# EAGLE board rocketnet-daughter-14 (EAGLE 6.4)

Size 17.8 x 6.6 mm. Coordinates in mm from the lower left corner, seen from the top.
Outline: 17.8,0 17.8,6.6 1,6.6 0,5.6 0,1 1,0 17.8,0
Copper layers (1*16): Top 0.035mm / dielectric 1.5mm / Bottom 0.035mm
Design rules "lpkf-s63-epl": minimum track width 10mil, minimum drill 0.35mm, track to track 8mil, track to pad 8mil, pad to pad 8mil, via to via 8mil, smd to smd 8mil, copper to edge 10mil, drill to drill 8mil, minimum pad ring 10mil, minimum via ring 8mil, stop-mask expansion 4mil, vias tented up to drill 0mil, thermal gap 10mil
Holes 2.44 mm at 16.1,3.3 1.7,3.3

## Footprints (pad centres in the part's own frame; a part is rotated, then mirrored left to right if it is on the bottom)
22AWG-WIRE = drill 0.9 pad 1.6: P$1 0,0
HARWIN-M50-31507-NO-HOLES = smd 0.71 x 1.65: 1 -3.81,-1.925; 2 -3.81,1.925; 3 -2.54,-1.925; 4 -2.54,1.925; 5 -1.27,-1.925; 6 -1.27,1.925; 7 0,-1.925; 8 0,1.925; 9 1.27,-1.925; 10 1.27,1.925; 11 2.54,-1.925; 12 2.54,1.925; 13 3.81,-1.925; 14 3.81,1.925 | hole 0.71: 3.175,0; -3.175,0
26AWG-WIRE = drill 0.65: P$1 0,0

## Placement (x,y rotation side)
E$1  [22AWG-WIRE]  6.02,5.21 0 top
E$2  [HARWIN-M50-31507-NO-HOLES]  9.2,3.3 0 bottom
E$3  [22AWG-WIRE]  6.02,1.39 0 top
E$5  [22AWG-WIRE]  12.38,5.21 0 top
E$6  [22AWG-WIRE]  12.38,1.39 0 top
E$9  [26AWG-WIRE]  7.93,2.67 0 top
E$13  [26AWG-WIRE]  9.2,3.93 0 top
E$14  [26AWG-WIRE]  10.47,2.67 0 top

## Library data of the parts
E$1-E$3 E$5 E$6 E$9 E$13 E$14 = rocketnet-connector

## Nets
S$4: E$9.P$1

## Tracks (layer width: path | path; a pad name or v marks a point on that pad's centre or on a via)
(copper drawn outside any net)
  shapes: Bottom area x5, Top area x5

## Text on the board
Document: TOP VIEW (M50 on bottom of board) | B+ | SMCLK | SMDAT | !PRSNT | B- | #2-56 nylock / (5/32" OD) | B+ | B-